# Altium PCB Level_Translation.PcbDoc
Units mil, origin at the board's own origin, x right, y up, seen from the top; angles counter-clockwise.
Board outline 740 x 1400 mil, 2 copper layers (Top Layer, Bottom Layer); 4 components, 22 nets, 50 pads, 14 vias.
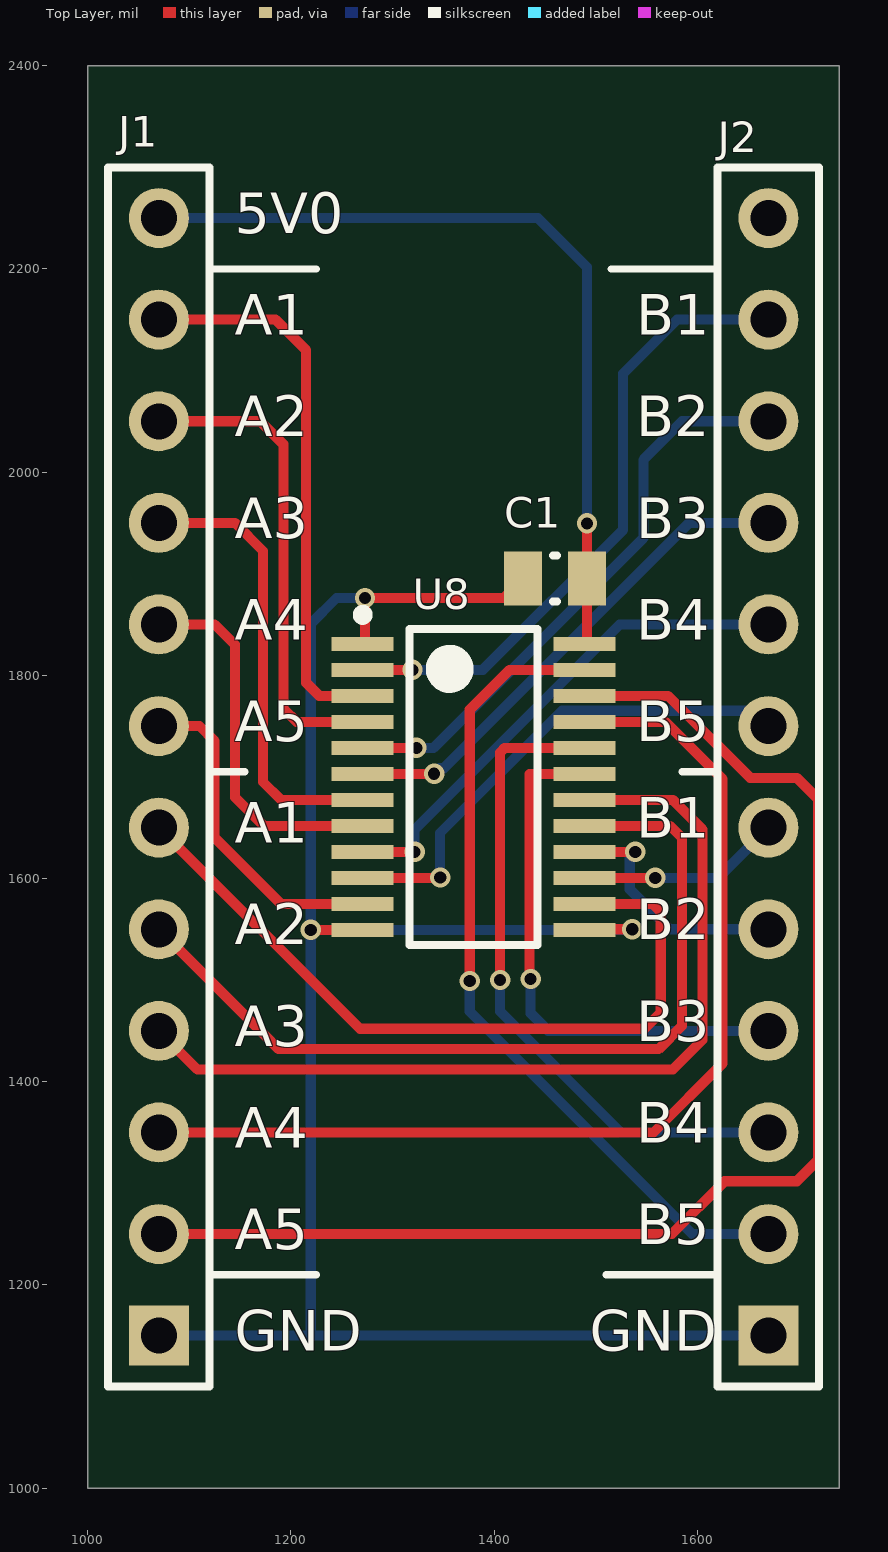
[diagram p0: Top Layer view]
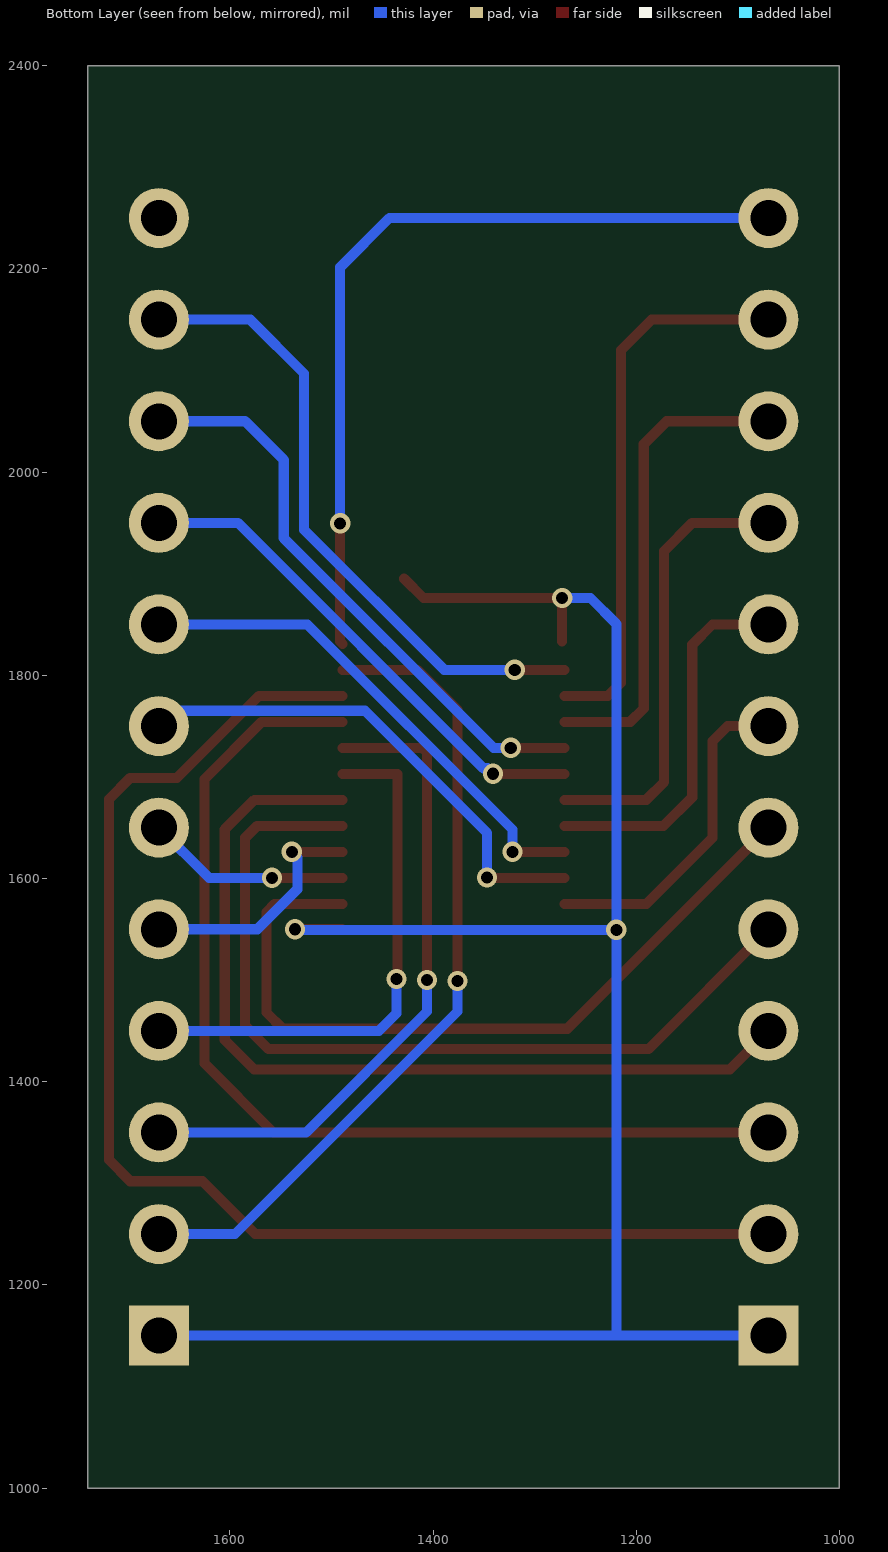
[diagram p1: Bottom Layer view, seen from below]

## Layer stack, top to bottom
Top Layer: signal copper 1.4
Dielectric: dielectric 12.6, FR-4, Dk 4.8
Bottom Layer: signal copper 1.4

## Board outline
1000,1000 1000,2400 1740,2400 1740,1000

## Design rules (kind name [scope] priority, off if disabled: settings)
Clearance [All] p1: gap=10
PolygonConnect [All] p1: connectstyle=Relief reliefconductorwidth=10 reliefentries=4 polygonreliefangle="90 Angle" airgapwidth=10
RoutingVias [All] p1: holewidth=28 width=50 viastyle="Through Hole" minholewidth=28 minwidth=50 maxholewidth=28 maxwidth=50
SolderMaskExpansion [All] p1: expansion=4
Width [All] p1: maxlimit=20 minlimit=7 preferedwidth=10
28 further rules are at their usual default settings.

## Components (designator, comment, footprint, x,y, rotation, side; value= is the part's Value field where it differs from the comment)
C1 "CAP 100nF 16V 0805(2012)" CAPC0805(2012)100_L 1460,1895 r0 top
J1 "Header 12" HDR1X12 1070,1150 r90 top
J2 "Header 12" HDR1X12 1670,1150 r90 top
U8 "SN74CBTD3384CPWR" TSOP65P620X120-24N 1380,1690.16 r0 top

## Footprints (in the part's own frame and the unit in brackets; to place one, negate y for a bottom-side part, rotate by r counter-clockwise, add the part's x,y. Pads: shape width x height; smd on the part's side, far side on the other; paste and mask are expansions set on the pad)
CAPC0805(2012)100_L [mm] "Chip Capacitor, Body 2.0x1.2mm, Height 1.0mm, IPC High Density"
  rect 0.95x1.35 smd: 1(-0.8,0) 2(0.8,0)
  silkscreen extent -0.05,-0.58 0.05,0.58, body extent -1.1,-0.72 1.1,0.72, height 1
HDR1X12 [mm] "Connector; Header; 12 Position"
  rect 1.5x1.5 hole 0.9: 1(0,0)
  round 1.5 hole 0.9: 2(2.54,0) 3(5.08,0) 4(7.62,0) 5(10.16,0) 6(12.7,0) 7(15.24,0) 8(17.78,0) 9(20.32,0) 10(22.86,0) 11(25.4,0) 12(27.94,0)
  silkscreen extent -1.27,-1.27 29.21,1.27
TSOP65P620X120-24N [mm] "TSOP, 24-Leads, Body 7.80x4.35mm, Pitch 0.65mm, IPC Medium Density"
  rect 1.55x0.35 smd mask+0.07: 1(-2.775,3.575) 2(-2.775,2.925) 3(-2.775,2.275) 4(-2.775,1.625) 5(-2.775,0.975) 6(-2.775,0.325) 7(-2.775,-0.325) 8(-2.775,-0.975) 9(-2.775,-1.625) 10(-2.775,-2.275) 11(-2.775,-2.925) 12(-2.775,-3.575) 13(2.775,-3.575) 14(2.775,-2.925) 15(2.775,-2.275) 16(2.775,-1.625) 17(2.775,-0.975) 18(2.775,-0.325) 19(2.775,0.325) 20(2.775,0.975) 21(2.775,1.625) 22(2.775,2.275) 23(2.775,2.925) 24(2.775,3.575)
  silkscreen extent -2.9,-3.95 1.6,4.42, body extent -2.2,-3.95 2.2,3.95, height 1.2

## Part data
C1: library part CMP-1036-04400-1, "CAP 100nF 16V ±5% 0805 (2012 Metric) Thickness 1mm SMD"
J1 J2: "Header, 12-Pin"
U8: "10-BIT FET BUS SWITCH WITH LEVEL SHIFTING"

## Via types
v1: diameter 20, hole 12, Top Layer to Bottom Layer, tented both sides, 14 vias

## Nets (pads, with @x,y where several pads share a name; then routed paths per layer and width w, separated by ;. In a path a pad name is that pad's centre, name@x,y a point inside that pad or via, vN(x,y) a via of type N, cw(c..) or ccw(c..) an arc to the next point about the centre after c; other vN are vias at no path point)
1A1: J1.11 U8.3 | length 545.9
  Top Layer w10: J1.11 1185,2150 1215,2120 1215,1792.64 1227.91,1779.72 U8.3
1A2: J1.10 U8.4 | length 475.6
  Top Layer w10: J1.10 1170,2050 1192.64,2027.36 1192.64,1767.36 1205.87,1754.13 U8.4
1A3: J1.9 U8.7 | length 446.9
  Top Layer w10: J1.9 1145,1950 1172.64,1922.36 1172.64,1695 1190.28,1677.36 U8.7
1A4: J1.8 U8.8 | length 370.7
  Top Layer w10: J1.8 1125,1850 1145,1830 1145,1680 1173.23,1651.77 U8.8
1A5: J1.7 U8.11 | length 328.9
  Top Layer w10: J1.7 1110,1750 1125,1735 1125,1640 1190,1575 U8.11
1B1: J2.11 U8.2 | length 632.1
  Top Layer w10: U8.2 v1(1319.69,1805.31)
  Bottom Layer w10: v1(1319.69,1805.31) 1389.03,1805.31 1527,1943.28 1527,2097 1580,2150 J2.11
1B2: J2.10 U8.5 | length 577.5
  Top Layer w10: U8.5 v1(1323.54,1728.54)
  Bottom Layer w10: v1(1323.54,1728.54) 1340.54,1728.54 1547,1935 1547,2012 1585,2050 J2.10
1B3: J2.9 U8.6 | length 501.6
  Top Layer w10: U8.6 v1(1341,1703) v1(1341,1703)
  Bottom Layer w10: v1(1341,1703) 1346.54,1708.54 1350.54,1708.54 1592,1950 J2.9
1B4: J2.8 U8.9 | length 504.8
  Top Layer w10: U8.9 v1(1321.82,1626.18)
  Bottom Layer w10: v1(1321.82,1626.18) 1321.82,1648.1 1523.72,1850 J2.8
1B5: J2.7 U8.10 | length 499.4
  Top Layer w10: U8.10 1346.59,1600.59 v1(1347,1601)
  Bottom Layer w10: v1@1346.82,1601 1346.82,1644.82 1467,1765 1655,1765 J2.7
2A1: J1.6 U8.14 | length 759.7
  Top Layer w10: J1.6 1268,1452 1548,1452 1564,1468 1564,1567 1556,1575 U8.14
2A2: J1.5 U8.17 | length 859
  Top Layer w10: J1.5 1188,1432 1562,1432 1585,1455 1585,1640 1573.23,1651.77 U8.17
2A3: J1.4 U8.18 | length 897.8
  Top Layer w10: J1.4 1108,1412 1576,1412 1605,1441 1605,1648.28 1575.92,1677.36 U8.18
2A4: J1.3 U8.21 | length 1022
  Top Layer w10: J1.3 1557,1350 1625,1418 1625,1697.72 1568.58,1754.13 U8.21
2A5: J1.2 U8.22 | length 1306.1
  Top Layer w10: J1.2 1575,1250 1627,1302 1698,1302 1719,1323 1719,1678 1698,1699 1652,1699 1571.28,1779.72 U8.22
2B1: J2.6 U8.15 | length 201.2
  Top Layer w10: U8.15 v1(1558.59,1600.59)
  Bottom Layer w10: v1(1558.59,1600.59) 1620.59,1600.59 J2.6
2B2: J2.5 U8.16 | length 241.5
  Top Layer w10: U8.16 v1(1539,1626.18)
  Bottom Layer w10: v1(1539,1626.18) 1533.59,1620.77 1533.59,1589.41 1573,1550 J2.5
2B3: J2.4 U8.19 | length 534.2
  Top Layer w10: v1@1434.95,1499 v1@1434.95,1500.95 ; v1(1436,1501) 1435,1501 v1@1434.95,1500.95 ; U8.19 1434.95,1702.95 v1@1434.95,1500.95
  Bottom Layer w10: v1(1436,1501) 1436,1467.28 1453.28,1450 J2.4
2B4: J2.3 U8.20 | length 653.4
  Top Layer w10: v1(1406,1500) 1406,1724 1410.54,1728.54 U8.20
  Bottom Layer w10: v1(1406,1500) 1406,1469 1525,1350 J2.3
2B5: J2.2 U8.23 | length 811.2
  Top Layer w10: v1(1376,1499) 1376,1766 1415.31,1805.31 U8.23
  Bottom Layer w10: v1(1376,1499) 1376,1469 1595,1250 J2.2
5V0: C1.2 J1.12 U8.24 | length 813.1
  Top Layer w10: U8.24 1491.5,1833.15 C1.2 v1(1491.5,1949.5)
  Bottom Layer w10: J1.12 1443,2250 1491.5,2201.5 v1(1491.5,1949.5)
GND: C1.1 J1.1 J2.1 U8.1 U8.12 U8.13 | length 1986.8
  Top Layer w10: v1(1219.59,1549.41) U8.12 ; U8.1@1273,1833.16 v1(1273,1876) 1409.5,1876 C1.1 ; U8.13 1489.84,1550 v1(1536,1550)
  Bottom Layer w10: J1.1 J2.1 ; 1216,1150 1219.59,1153.59 v1(1219.59,1549.41) ; v1(1273,1876) 1245,1876 1219.59,1850.59 v1(1219.59,1549.41) ; v1@1536,1549.41 v1(1219.59,1549.41)
pads on no net: J2.12

## Silkscreen, mask and mechanical layers (free items; w line width, h text height)
Top Overlay:
  lines w7: 1120,1210 1225,1210 ; 1120,1705 1155,1705 ; 1120,2200 1225,2200 ; 1510,1210 1615,1210 ; 1515,1210 1620,1210 ; 1515,2200 1620,2200 ; 1585,1705 1620,1705
  text "5V0" at 1145,2235 h40
  text "A1" at 1145,2135 h40
  text "B1" at 1540,2135 h40
  text "A2" at 1145,2035 h40
  text "B2" at 1540,2035 h40
  text "A3" at 1145,1935 h40
  text "B3" at 1540,1935 h40
  text "A4" at 1145,1835 h40
  text "B4" at 1540,1835 h40
  text "A5" at 1145,1735 h40
  text "B5" at 1540,1735 h40
  text "B1" at 1540,1640 h40
  text "A1" at 1145,1635 h40
  text "B2" at 1540,1540 h40
  text "A2" at 1145,1535 h40
  text "B3" at 1540,1440 h40
  text "A3" at 1145,1435 h40
  text "B4" at 1540,1340 h40
  text "A4" at 1145,1335 h40
  text "B5" at 1540,1240 h40
  text "A5" at 1145,1235 h40
  text "GND" at 1145,1135 h40
  text "GND" at 1494,1135 h40
Mechanical 2:
  the board outline again, w10